# Allegro board backup.brd
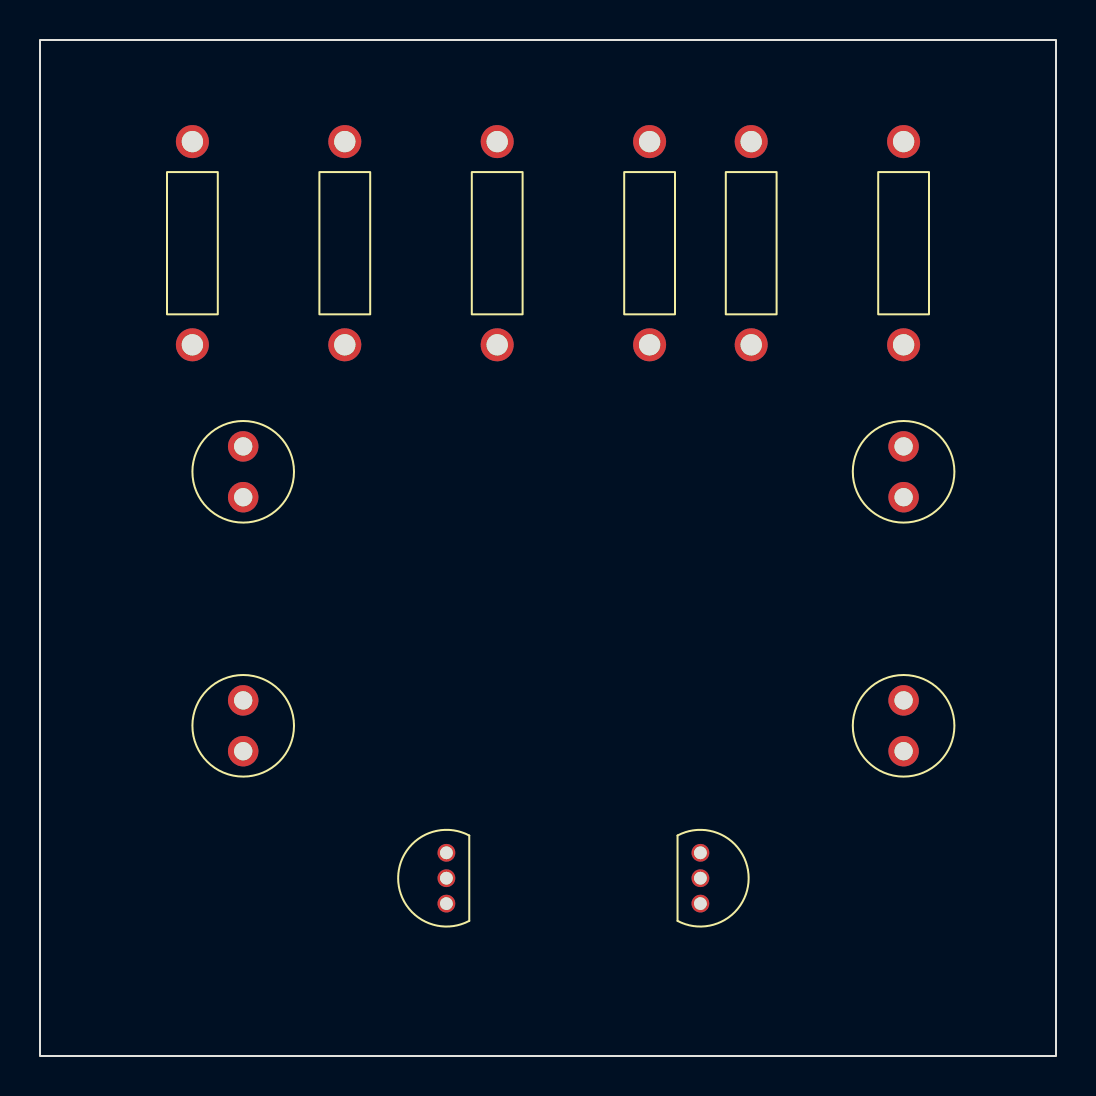
[diagram p0: board, top side]
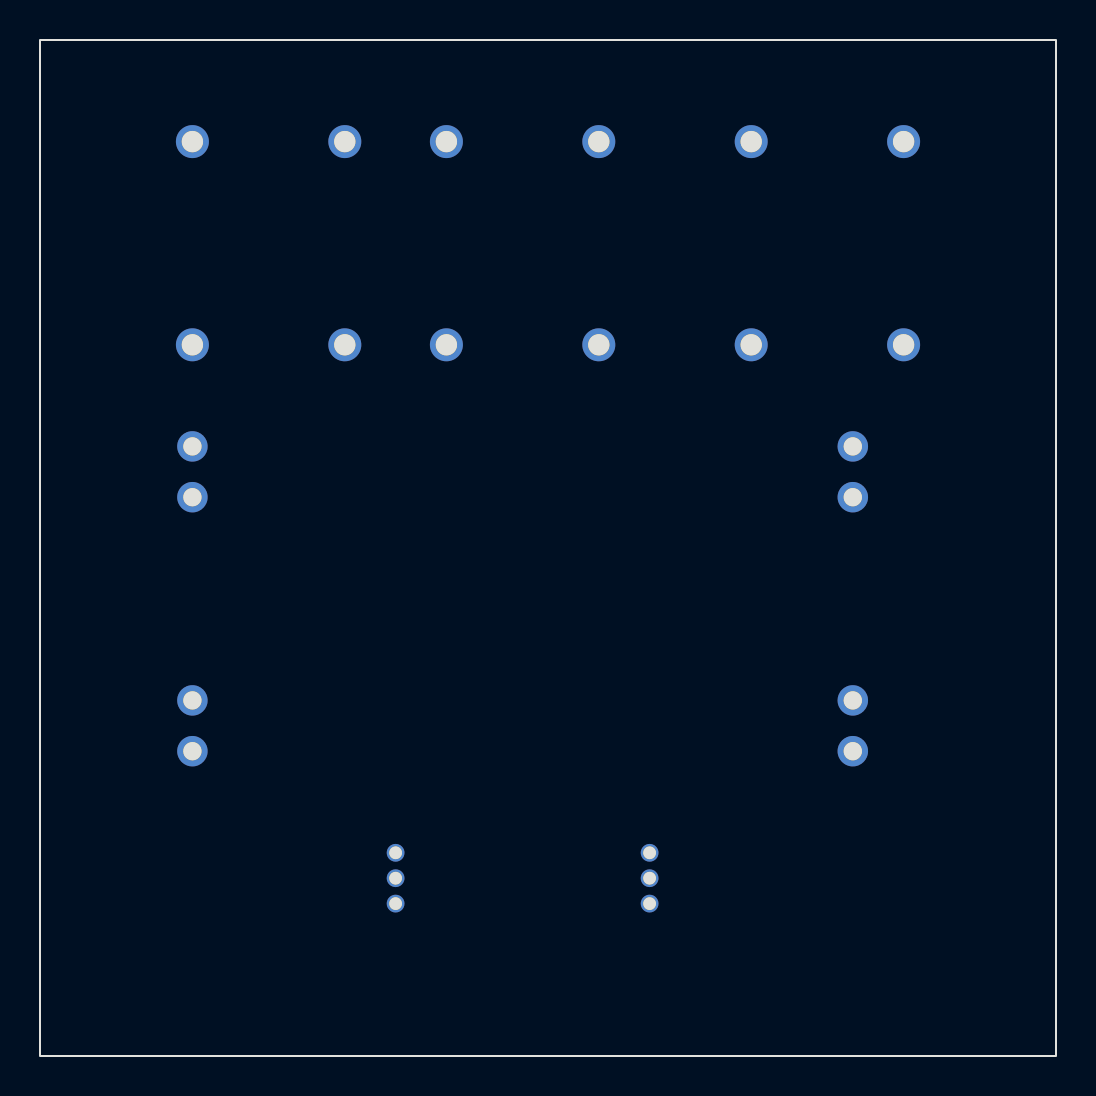
[diagram p1: board, bottom side, seen from below]

Outline 50.8 x 50.8 mm; copper layers: TOP, BOTTOM. Coordinates in mm from the lower left corner of the outline.
Outline path: rectangle 0,0 50.8,50.8

## Placement (name value [footprint] x y rotation side)
C1  CAP POL  [CAP196]  43.18 17.78 180 top
C2  CAP POL  [CAP196]  10.16 27.94 0 top
D1  LED  [CAP196]  43.18 27.94 0 top
D2  LED  [CAP196]  10.16 15.24 0 top
Q1  NPN ECB  [TO92]  33.02 10.16 0 top
Q2  NPN ECB  [TO92]  20.32 7.62 180 top
R1  R  [RES400]  43.18 35.56 0 top
R2  R  [RES400]  30.48 45.72 180 top
R3  R  [RES400]  7.62 45.72 180 top
R4  R  [RES400]  15.24 35.56 0 top
R5  R  [RES400]  35.56 45.72 180 top
R6  R  [RES400]  22.86 35.56 0 top

## Library data of the parts
C1 C2 = CAP POL: Tolerance: ***; User Part Number: ***
D1 D2 = LED: Tolerance: ***; User Part Number: ***
Q1 Q2 = NPN ECB
R1-R6 = R: Tolerance: ***; User Part Number: ***

## Footprints (pads in the part's own frame, mm; a bottom-side part is the same pattern mirrored in y, then rotated)
CAP196
  round 1.524 hole 0.914: 1(0,0) 2(0,2.54)
RES400
  round 1.651 hole 1.067: 1(0,0) 2(0,10.16)
TO92
  round 0.889 hole 0.635: 1(0,0) 2(0,-1.27) 3(0,-2.54)

## Nets
GND: Q1.1(E) Q2.1(E)
VCC: R2.1 R3.1 R5.1 R6.2
N00244: R1.1 R5.2
N00253: R4.1 R6.1
N00290: C2.2 Q1.3(B) R3.2
N00297: C2.1 D2.2(ANODE) R4.2
N00304: C1.1 D1.2(ANODE) R1.2
N00327: D2.1(CATHODE) Q2.2(C)
N00331: D1.1(CATHODE) Q1.2(C)
N00407: C1.2 Q2.3(B) R2.2
